# EAGLE board Gate (EAGLE 7.7.0)
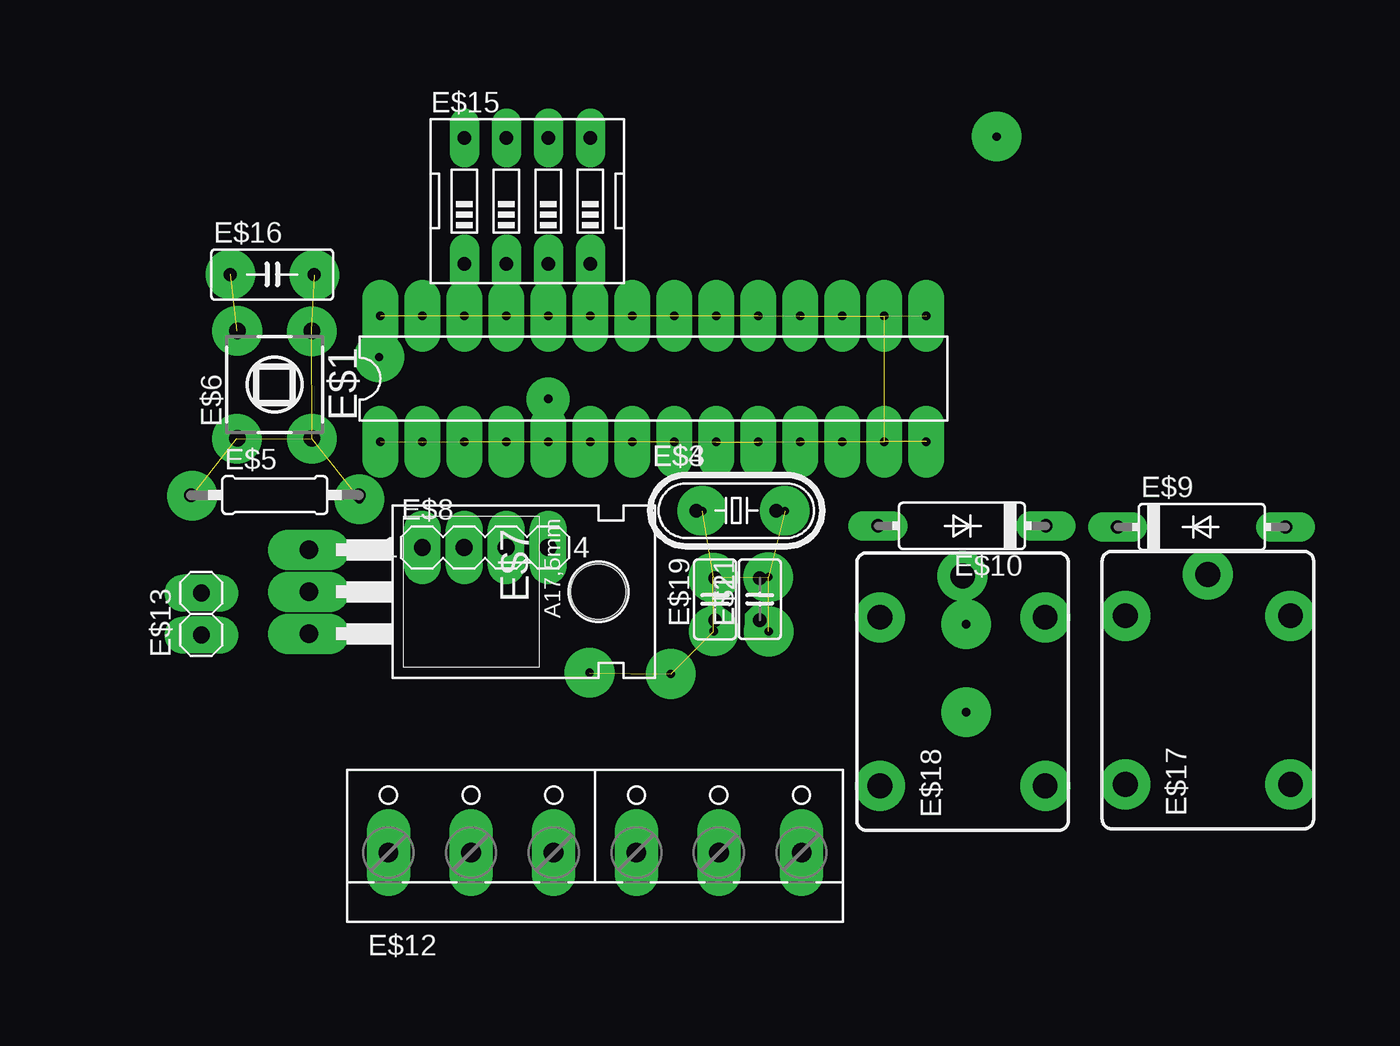
[diagram p0: board, top side]
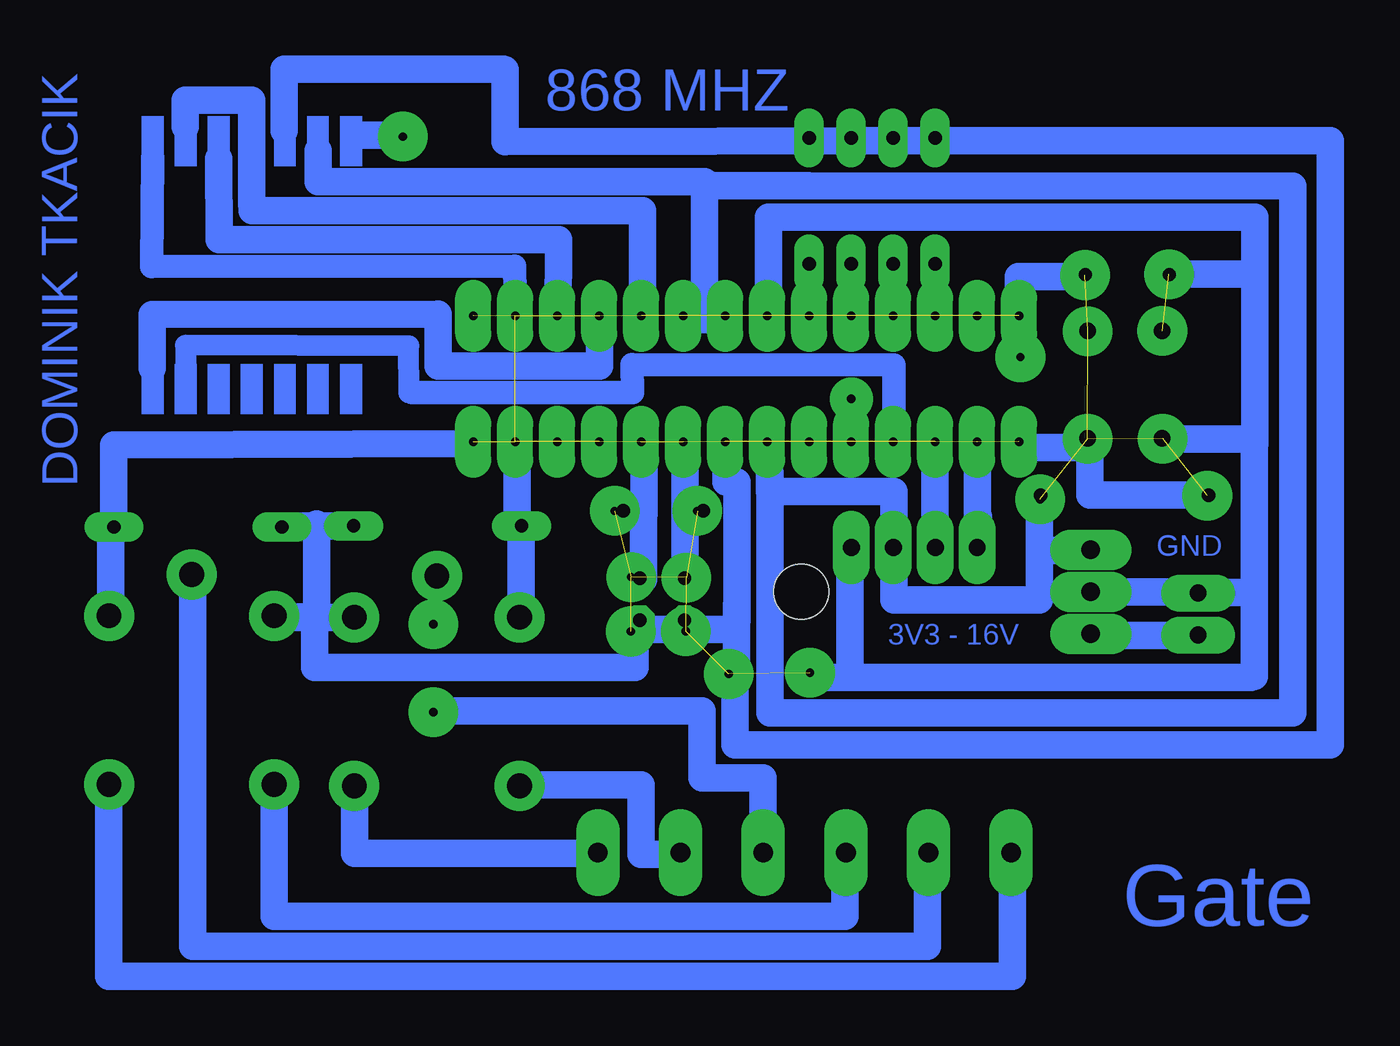
[diagram p1: board, bottom side, seen from below]

No outline drawn. Coordinates in mm, seen from the top.
Copper layers (1*16): Top 0.035mm / dielectric 1.5mm / Bottom 0.035mm
Design rules "default *": minimum track width 10mil, minimum drill 24mil, track to track 8mil, track to pad 8mil, pad to pad 8mil, via to via 8mil, smd to smd 8mil, copper to edge 40mil, drill to drill 8mil, minimum pad ring 10mil, minimum via ring 8mil, stop-mask expansion 4mil, vias tented up to drill 0mil, thermal gap 10mil

## Footprints (pad centres in the part's own frame; a part is rotated, then mirrored left to right if it is on the bottom)
DIL28-3 = drill 0.5 pad 2.184 long: 1 -16.51,-3.81; 2 -13.97,-3.81; 3 -11.43,-3.81; 4 -8.89,-3.81; 5 -6.35,-3.81; 6 -3.81,-3.81; 7 -1.27,-3.81; 8 1.27,-3.81; 9 3.81,-3.81; 10 6.35,-3.81; 11 8.89,-3.81; 12 11.43,-3.81; 13 13.97,-3.81; 14 16.51,-3.81; 15 16.51,3.81; 16 13.97,3.81; 17 11.43,3.81; 18 8.89,3.81; 19 6.35,3.81; 20 3.81,3.81; 21 1.27,3.81; 22 -1.27,3.81; 23 -3.81,3.81; 24 -6.35,3.81; 25 -8.89,3.81; 26 -11.43,3.81; 27 -13.97,3.81; 28 -16.51,3.81
C2.5-2 = drill 0.813 pad 1.6 octagon: 1 -1.27,0; 2 1.27,0
HC49/S = drill 0.813: 1 -2.413,0; 2 2.413,0
0207/10 = drill 0.813 octagon: 1 -5.08,0; 2 5.08,0
TL1105T = drill 1 pad 1.676: 1 -2.25,3.25; 2 2.25,3.25; 3 -2.25,-3.25; 4 2.25,-3.25
TO220 = drill 1.118 long: 1 -2.54,-6.35; 2 0,-6.35; 3 2.54,-6.35 | hole 3.302: 0,11.176
MA04-1 = drill 1.016 long: 1 -3.81,0; 2 -1.27,0; 3 1.27,0; 4 3.81,0
C5102 = drill 0.813 long: A 5.08,0; C -5.08,0
W237-136 = drill 1.194 long: 1 -12.5,-1.27; 2 -7.5,-1.27; 3 -2.5,-1.27; 4 2.5,-1.27; 5 7.5,-1.27; 6 12.5,-1.27
1X02 = drill 1.016 long: 1 -1.27,0; 2 1.27,0
EDG-04 = drill 0.813 long: 1 -3.81,-3.81; 2 -1.27,-3.81; 3 1.27,-3.81; 4 3.81,-3.81; 5 3.81,3.81; 6 1.27,3.81; 7 -1.27,3.81; 8 -3.81,3.81
C050-030X075 = drill 0.813 octagon: 1 -2.54,0; 2 2.54,0
CQ1 = drill 1.5: 1 4.5,-5; 2 4.5,5; C 7,0; NC -5.7,-5; NO -5.7,5

## Placement (x,y rotation side)
E$1  [DIL28-3]  59.75,65.13 0 top
E$2  [C2.5-2]  66.19,51.79 90 top
E$3  [HC49/S]  64.77,57.15 0 top
E$4  [HC49/S]  64.77,57.15 0 top
E$5  [0207/10]  36.85,58.09 0 top
E$6  [TL1105T]  36.83,64.77 0 top
E$7  [TO220]  45.25,52.24 270 top
E$8  [MA04-1]  49.58,54.92 0 top
E$9  [C5102]  92.93,56.16 0 top
E$10  [C5102]  78.42,56.23 180 top
E$11  [C2.5-2]  66.19,51.79 90 top
E$12  [W237-136]  56.22,37.73 0 top
E$13  [1X02]  32.41,50.89 90 top
E$15  [EDG-04]  52.13,75.88 0 top
E$16  [C050-030X075]  36.69,71.43 0 top
E$17  [CQ1]  93.3,46.29 90 top
E$18  [CQ1]  78.46,46.2 90 top
E$19  [C2.5-2]  63.48,51.78 90 top

## Library data of the parts
E$1 = atmega328L
E$2 E$11 E$19 = capacitor-wima
E$3 E$4 = crystal
E$5 = resistor
E$6 = switch
E$7 = transistor-pnp
E$8 = con-lstb
E$9 E$10 = diode
E$12 = con-wago-500
E$13 = pinhead
E$15 = special
E$16 = rcl
E$17 E$18 = relay

## Tracks (layer width: path | path; a pad name or v marks a point on that pad's centre or on a via)
S$1
  Bottom 1.676: 63.45,60.93 63.45,52.99 63.49,52.99
S$2
  Bottom 1.676: 65.94,60.93 65.94,56.96 65.96,56.96 | 67.69,56.96 65.96,56.96 | 65.96,56.96 65.96,52.99
S$3
  Bottom 1.676: 26.68,47.01 26.68,44.9 58.32,44.9 58.32,59.47
S$4
  Bottom 1.676: 45.71,56.8 45.75,56.8 45.75,61.53
S$5
  Bottom 1.676: 48.28,61.13 48.32,61.13 48.32,56.72
S$6
  Bottom 1.676: 38.72,54.75 42,54.75 | 42,54.75 42,58.08 | 58.33,61.14 58.33,58.3 50.8,58.3 50.8,51.74 42,51.74 42,54.75
S$7
  Bottom 1.676: 38.96,61.44 38.96,58.09 32.68,58.09
S$8
  Bottom 1.676: 53.46,55.01 53.46,47.06 29.22,47.06
S$9
  Bottom 1.676: 31.38,52.22 39.31,52.22
S$10
  Bottom 1.676: 32.38,49.61 39.02,49.61 37.02,49.67
S$11
  Bottom 1.676: 56.02,76.81 61.94,76.81 62.28,77.05 | 62.28,68.73 62.28,77.05 | 85.65,78.92 85.65,77.05 62.28,77.05
S$12
  Bottom 1.676: 43.28,68.85 43.28,71.32 39.06,71.32
S$13  (via drill 0.5 pad 3)  (5 unrouted)
  other vias: 39.09,68 41.97,57.84 39.1,61.49 34.55,61.5 31.85,58.05 39.25,71.4 78.67,50.28 78.67,44.96
S$14
  Bottom 1.676: 55.89,47.36 55.6,47.07 51.87,47.07
S$15
  Bottom 1.422: 60.9,68.59 63.53,68.59
S$16
  Bottom 0.406: 60.97,68.86 60.84,68.86
S$17
  Bottom 1.27: 80.15,64.27 80.16,67.12 93.67,67.16 93.67,65.81
S$18
  Bottom 1.676: 68.63,68.73 68.63,65.9 78.4,65.91 78.4,69.03 95.68,69.02 95.68,65.77
S$19
  Bottom 1.422: 73.71,68.7 73.76,71.94 95.72,71.91 95.67,78.54
S$20
  Bottom 1.676: 60.83,47.26 arc-90 60.33,47.76 60.33,51.45
S$21
  Bottom 1.676: 71.14,68.79 71.11,73.56 91.64,73.56 91.67,78.44
S$22
  Bottom 1.422: 60.32,58.87 60.97,58.87
  Bottom 1.676: 60.32,50.5 60.32,58.87 | 60.97,58.87 60.97,60.95
S$23
  Bottom 1.676: 93.69,80.38 93.69,81.97 89.68,81.97 89.68,75.65
S$24
  Bottom 1.676: 66.02,68.72 66.03,75.29 89.65,75.29
S$25
  Bottom 1.676: 80.14,79.87 83.37,79.87
S$26
  Bottom 1.676: 32.42,52.21 29.12,52.21 29.12,52.31
S$27
  Bottom 1.422: 50.85,61.32 50.81,61.32 50.81,65.97 66.65,65.99 66.64,64.3 79.97,64.3
S$28
  Bottom 1.676: 87.69,80.13 87.69,83.87 74.44,83.87
S$29
  Bottom 1.676: 66.76,49.91 66.76,49.97 60.66,49.97
S$30  (via drill 0.5 pad 3)  (7 unrouted)
  other vias: 62.71,57.13 67.71,57.13 66.71,53.13 63.37,53.09 63.4,49.85 66.73,49.84 55.89,47.34 60.81,47.27
S$31
  Bottom 1.676: 62.19,57.16 63.33,57.16 63.33,57.12
S$32
  Bottom 1.676: 60.42,47.48 60.42,42.98 24.4,42.98 24.4,79.53 52.66,79.53
S$33
  Bottom 1.676: 83.57,56.28 83.57,56.22 88.25,56.22
S$34  (via drill 0.5 pad 2.6)
  other vias: 53.39,63.91
S$35
  Bottom 1.676: 85.73,56.33 85.73,50.71 88.19,50.71 88.19,51 88,51
S$36
  Bottom 1.676: 88.33,50.77 88.33,50.69 83.53,50.69
S$37
  Bottom 1.676: 98,56 98,58.28 98.01,61.11 76.34,61.21
S$38
  Bottom 1.676: 29,47.11 28.99,74.91 58.4,74.91 58.39,68.55
S$39
  Bottom 1.676: 34.56,61.47 29.23,61.47
S$40  (via drill 0.5 pad 3)
  other vias: 43.16,66.44
S$41  (via drill 0.1 pad 0.5)  (27 unrouted)
  other vias: 43.24,68.94 45.78,68.94 48.33,68.94 50.86,68.94 53.4,68.94 55.93,68.94 58.48,68.94 61.02,68.94 63.55,68.94 66.09,68.94 68.63,68.93 71.17,68.92 73.72,68.92 76.27,68.94 76.27,61.32 73.72,61.32 71.17,61.32 68.63,61.32 66.1,61.31 63.58,61.31 61.02,61.33 58.48,61.32 55.94,61.32 53.4,61.32 50.86,61.33 48.32,61.32 45.79,61.31 43.24,61.33
S$42
  Bottom 1.676: 34.29,71.46 29.39,71.46
S$43
  Bottom 1.676: 73.65,61.31 73.6,61.31 73.6,56.28
S$44
  Bottom 1.676: 26.69,45.59 26.68,76.79 57.21,76.81
S$45
  Bottom 1.676: 73.44,56.12 73.36,56.12 73.36,50.51
S$46
  Bottom 1.676: 98.04,56.16 98.21,56.16 98.21,50.87
S$47
  Bottom 1.676: 66.47,49.84 66.47,47.67 85.85,47.67 85.85,50.54
S$48
  Bottom 1.676: 73.49,40.52 73.49,40.57
S$49
  Bottom 1.676: 78.65,45.03 62.43,45.03 62.43,40.98 58.74,40.98 58.74,36.59
S$50
  Bottom 1.676: 83.45,40.46 83.45,36.41 68.58,36.41
S$51  (via drill 0.5 pad 3)
  other vias: 80.52,79.78
S$52
  Bottom 1.676: 48.72,79.53 74.34,79.47 74.34,83.84
S$53
  Bottom 1.676: 88.31,40.52 88.31,32.6 53.76,32.6 53.76,36.59
S$54
  Bottom 1.422: 43.18,60.96 39.37,60.96
  Bottom 1.676: 43.18,60.96 39.37,60.96
S$55  (via drill 0.5 pad 3)  (1 unrouted)
  other vias: 34.17,71.45 34.57,68.02
S$56
  Bottom 1.676: 93.23,53.36 93.23,30.78 48.78,30.78 48.78,36.41
S$57
  Bottom 1.676: 98.32,40.63 98.32,28.96 43.63,28.96 43.63,36.29 43.69,36.29
S$58
  Bottom 1.676: 63.66,36.35 66.12,36.35 66.12,40.57 73.44,40.57
(copper drawn outside any net)
  shapes: Bottom area x13

## Text on the board
Bottom: 868 MHZ | DOMINIK TKACIK | GND | 3V3 - 16V | Gate